# Altium PCB TPS5430.PcbDoc
Units mm, origin at the board's own origin, x right, y up, seen from the top; angles counter-clockwise.
Board outline 24.89 x 15.75 mm, 2 copper layers (Top Layer, Bottom Layer); 13 components, 7 nets, 49 pads, 5 vias.
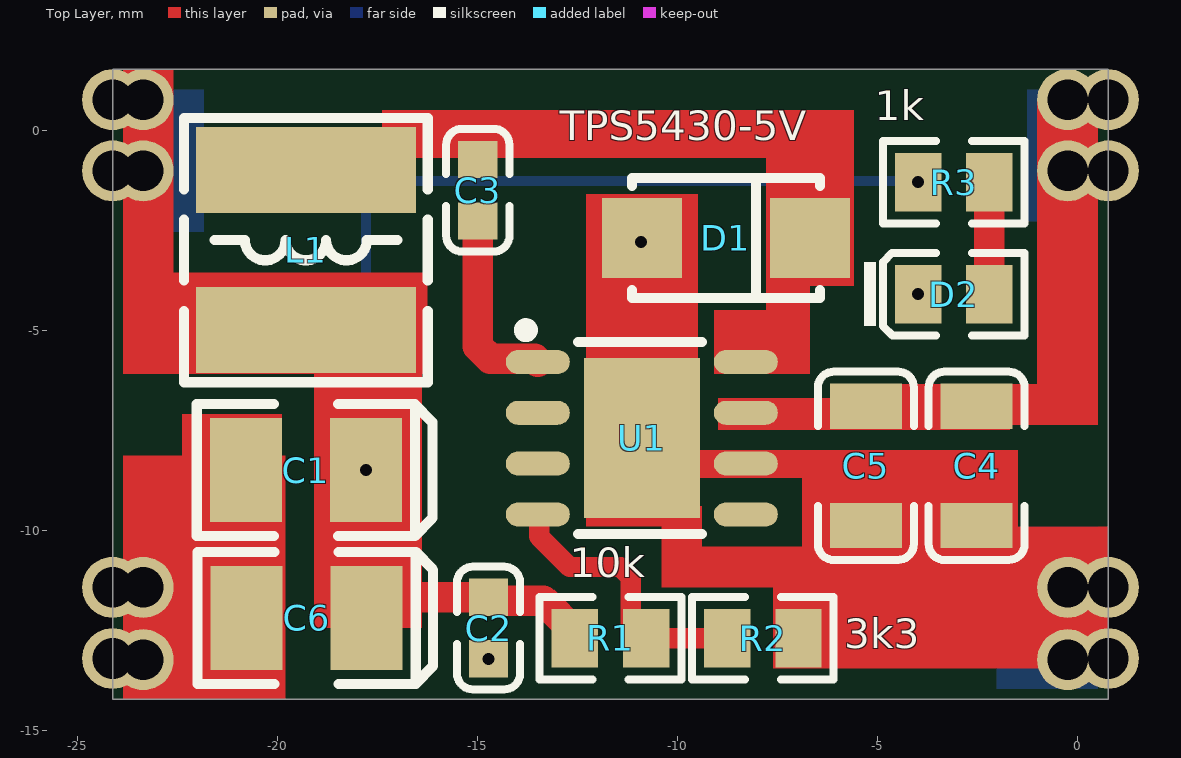
[diagram p0: Top Layer view]
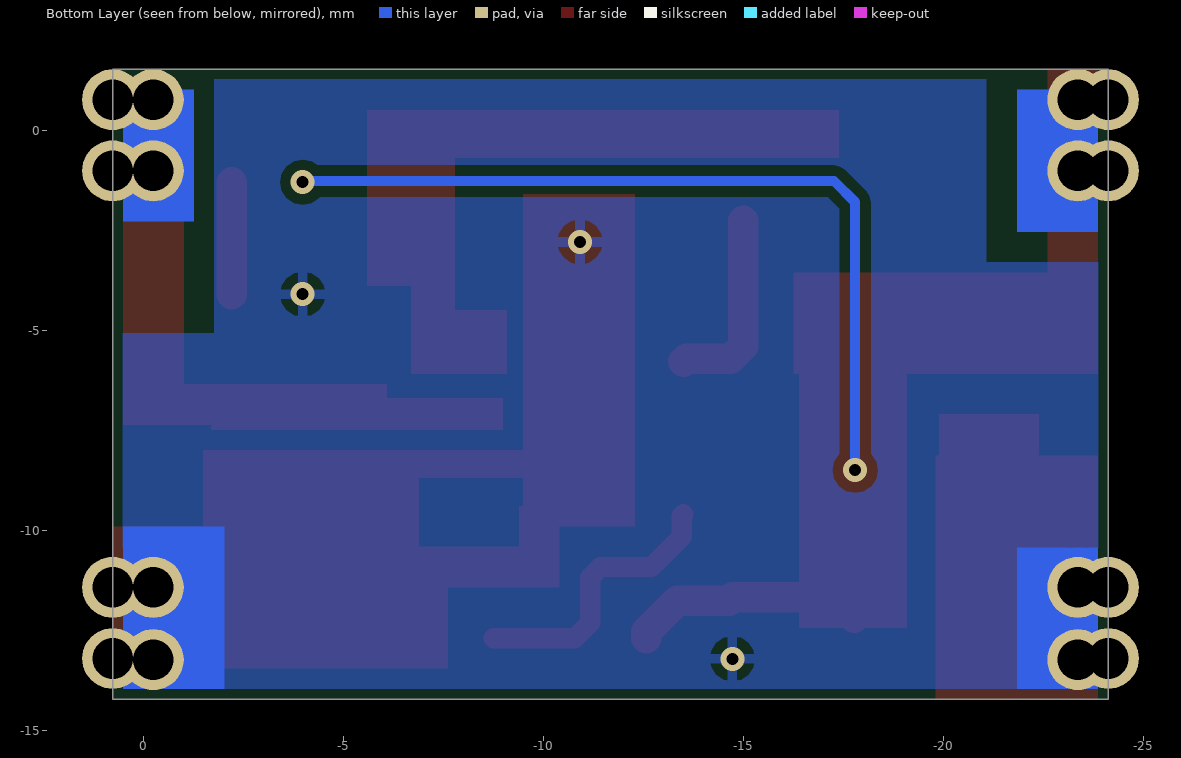
[diagram p1: Bottom Layer view, seen from below]
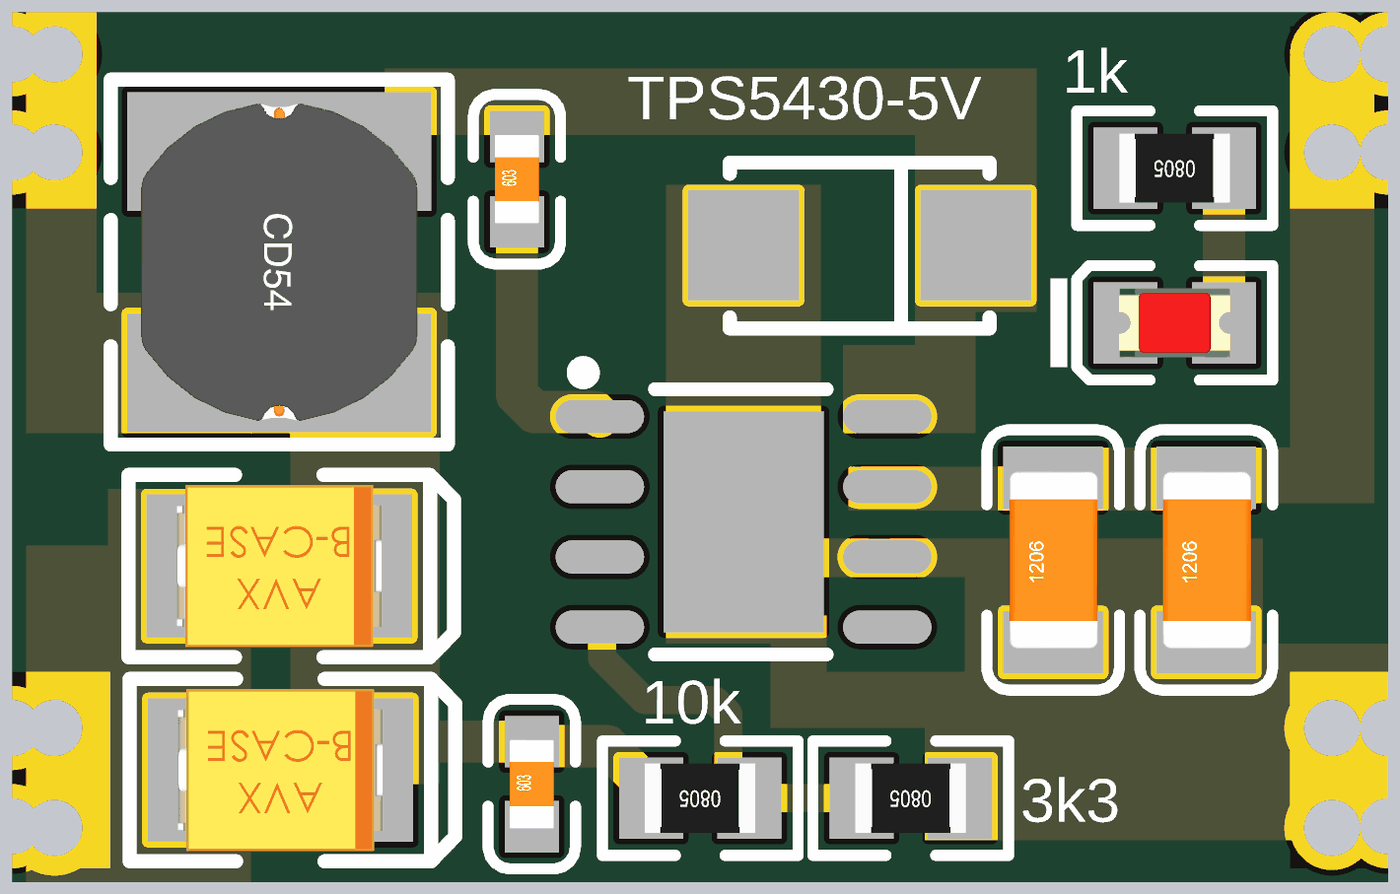
[diagram p2: 3D render of the assembled board from above, using the file's embedded part models]

## Layer stack, top to bottom
Top Solder: solder mask 0.0102, Solder Resist, Dk 3.5
Top Layer: signal copper 0.0356
Dielectric1: dielectric 0.32, FR-4, Dk 4.8
Bottom Layer: signal copper 0.0356
Bottom Solder: solder mask 0.0102, Solder Resist, Dk 3.5

## Board outline
-24.13,-14.224 0.762,-14.224 0.762,1.524 -24.13,1.524

## Design rules (kind name [scope] priority, off if disabled: settings)
Clearance [All] p1: gap=0.254 ignorepadtopadclearanceinfootprint=FALSE except(0: Arc-Hole Track-Hole SMDPad-Hole THPad-Hole Via-Hole Fill-Hole Poly-Hole Region-Hole Text-Hole)
HoleSize [All] p1: absolutevalues=TRUE maxlimit=5.08 minlimit=0.025 maxpercent=80.000 minpercent=20.000
MinimumSolderMaskSliver [All] p1: minsoldermaskwidth=0.076
PolygonConnect [All] p1: connectstyle=Relief reliefconductorwidth=0.254 reliefentries=4 polygonreliefangle="90 Angle" airgapwidth=0.254
RoutingVias [All] p1: holewidth=0.711 width=1.27 viastyle="Through Hole" minholewidth=0.711 minwidth=1.27 maxholewidth=0.711 maxwidth=1.27
SilkToSilkClearance [All] p1: silktosilkclearance=0
SilkToSolderMaskClearance SilkscreenOverComponentPads [IsPad] p1: minsilkscreentomaskgap=0 clearancetoexposedcopper=TRUE
SolderMaskExpansion [All] p1: expansion=0.102
Width [All] p1: maxlimit=0.762 minlimit=0.152 preferedwidth=0.254
26 further rules are at their usual default settings.

## Components (designator, comment, footprint, x,y, rotation, side; value= is the part's Value field where it differs from the comment)
C1 "100uF (107) ±10% 6.3V" LC-CASE-B_3528 -19.3,-8.5 r0 top
C2 "100nF (104) 10% 50V" LC-0603_C -14.732,-12.446 r90 top
C3 "10nF (103) 10% 50V" LC-0603_C -15,-1.5 r90 top
C4 "4.7uF (475) 10% 50V" LC-1206_C -2.53,-8.39 r90 top
C5 "4.7uF (475) 10% 50V" LC-1206_C -5.3,-8.39 r90 top
C6 "100uF (107) ±10% 6.3V" LC-CASE-B_3528 -19.28,-12.192 r0 top (schematic designator C1)
D1 "SS54" LC-SMA(DO-214AC)_S1 -8.8,-2.7 r180 top
D2 "红灯 0805" LC-0805_LED_S1 -3.1,-4.1 r0 top
L1 "22uH" CD54 -19.3,-3 r270 top
R1 "10KΩ (1002) ±1%" LC-0805_R -11.684,-12.7 r180 top
R2 "3.3KΩ (3301) ±1%" LC-0805_R -7.874,-12.7 r180 top
R3 "1KΩ (1001) ±1%" LC-0805_R -3.1,-1.3 r180 top
U1 "TPS5430DDAR" LC-SOP-8_EP_150mil -10.9,-7.7 r270 top

## Footprints (in the part's own frame and the unit in brackets; to place one, negate y for a bottom-side part, rotate by r counter-clockwise, add the part's x,y. Pads: shape width x height; smd on the part's side, far side on the other; paste and mask are expansions set on the pad)
CD54 [mm] "5.8*5.2*4.5mm（长宽高）"
  rect 2.15x5.5 smd: 1(-2,0) 2(2,0)
  silkscreen extent -3.3,-3.05 3.3,3.05, body extent -2.87,-2.5 2.87,2.5, height 4
LC-0603_C [mm]
  rect 0.93x0.98 smd: 1(-0.77,0) 2(0.77,0)
  silkscreen extent -1.53,-0.79 1.54,0.79, body extent -0.8,-0.4 0.8,0.4, height 0.3
LC-0805_LED_S1 [mm]
  rect 1.16x1.47 smd: A(0.89,0) K(-0.89,0)
  silkscreen extent -2.24,-1.04 1.77,1.03, body extent -1.01,-0.62 1.01,0.62, height 1.1
LC-0805_R [mm]
  rect 1.16x1.47 smd: 1(-0.89,0) 2(0.89,0)
  silkscreen extent -1.77,-1.04 1.77,1.03, body extent -1,-0.62 1,0.63, height 0.49
LC-1206_C [mm]
  rect 1.13x1.8 smd: 1(-1.49,0) 2(1.49,0)
  silkscreen extent -2.36,-1.2 2.35,1.2, body extent -1.6,-0.81 1.6,0.79, height 1
LC-CASE-B_3528 [mm]
  rect 1.8x2.6 smd: 1(1.5,0) 2(-1.5,0)
  silkscreen extent -2.73,-1.65 3.16,1.65, body extent -1.85,-1.47 1.85,1.46, height 2.03
LC-SMA(DO-214AC)_S1 [mm]
  rect 2x2 smd: 1(2.1,0) 2(-2.1,0)
  silkscreen extent -2.35,-1.5 2.35,1.5
LC-SOP-8_EP_150mil [mm]
  rect 4x2.9 smd: 0(0,0)
  oval 0.6x1.6 smd: 1(-1.905,-2.6) 2(-0.635,-2.6) 3(0.635,-2.6) 4(1.905,-2.6) 5(1.905,2.6) 6(0.635,2.6) 7(-0.635,2.6) 8(-1.905,2.6)
  silkscreen extent -2.85,-3.05 2.4,1.5

## Part data
C1 C6: library part "3528 100uF (107) 10% 6.3V", "钽电容", Package=3528, SuppliersPartNumber=C16133, ComponentLink1Description=供应, ComponentLink1URL=http://www.szlcsc.com/product/details_16815.html, Supplier=LC
C2: library part "0603 100nF (104) 10% 50V", "贴片电容", Package=0603, SuppliersPartNumber=C14663, ComponentLink1Description=供应, ComponentLink1URL=http://www.szlcsc.com/product/details_15331.html, Supplier=LC
C3: library part "0603 10nF (103) 10% 50V", "贴片电容", Package=0603, SuppliersPartNumber=C57112, ComponentLink1Description=供应, ComponentLink1URL=http://www.szlcsc.com/product/details_58143.html, Supplier=LC
C4 C5: library part "1206 4.7uF (475) 10% 50V", "贴片电容", Package=1206, SuppliersPartNumber=C29823, ComponentLink1Description=供应, ComponentLink1URL=http://www.szlcsc.com/product/details_30577.html, Supplier=LC
D1: library part "SMA(DO-214AC) SS54", "二极管", Package=SMA(DO-214AC), SuppliersPartNumber=C22452, ComponentLink1Description=供应, ComponentLink1URL=http://www.szlcsc.com/product/details_23178.html, Supplier=LC
D2: library part "0805 红灯", "发光二极管", Package=0805, SuppliersPartNumber=C2295, ComponentLink1Description=供应, ComponentLink1URL=http://www.szlcsc.com/product/details_2668.html, Supplier=LC
L1: library part L-CD, "贴片功率电感"
R1: library part "0805 10KΩ (1002) 1%", "贴片电阻", Package=0805, SuppliersPartNumber=C17414, ComponentLink1Description=供应, ComponentLink1URL=http://www.szlcsc.com/product/details_18102.html, Supplier=LC
R2: library part "0805 3.3KΩ (3301) 1%", "贴片电阻", Package=0805, SuppliersPartNumber=C26010, ComponentLink1Description=供应, ComponentLink1URL=http://www.szlcsc.com/product/details_26753.html, Supplier=LC
R3: library part "0805 1KΩ (1001) 1%", "贴片电阻", Package=0805, SuppliersPartNumber=C17513, ComponentLink1Description=供应, ComponentLink1URL=http://www.szlcsc.com/product/details_18201.html, Supplier=LC
U1: "DC-DCоƬ", Package=SOP-8_EP_150mil, SuppliersPartNumber=C9864, ComponentLink1Description=供应, ComponentLink1URL=http://www.szlcsc.com/product/details_10396.html, Supplier=LC

## Free pads (board coordinates)
  round 1.524 hole 1.016: 11(-24.13,-13.208) 11(-24.13,-11.43) 11(-24.13,-1.016) 11(-24.13,0.762) 11(-23.368,-13.238) 11(-23.368,-11.43) 11(-23.368,-1.016) 11(-23.368,0.762) 11(-0.254,-13.238) 11(-0.254,-11.43) 11(-0.254,-1.016) 11(-0.254,0.762) 11(0.762,-13.208) 11(0.762,-11.43) 11(0.762,-1.016) 11(0.762,0.762)

## Via types
v1: diameter 0.6, hole 0.3, Top Layer to Bottom Layer, 5 vias

## Nets (pads, with @x,y where several pads share a name; then routed paths per layer and width w, separated by ;. In a path a pad name is that pad's centre, name@x,y a point inside that pad or via, vN(x,y) a via of type N, cw(c..) or ccw(c..) an arc to the next point about the centre after c; other vN are vias at no path point)
5V: C1.1 C2.2 C6.1 L1.2 pad.11@-23.368,0.762 pad.11@-23.368,-1.016 pad.11@-24.13,0.762 pad.11@-24.13,-1.016 R1.2 R3.2 | length 26.7
  Top Layer w0.762: C6.1 -17.264,-11.676 C2.2 -14.648,-11.76 -13.359,-11.76 -12.574,-12.545 R1.2
  Bottom Layer w0.254: v1(-17.8,-8.5) -17.8,-1.798 -17.272,-1.27 -4.02,-1.27 v1(-3.99,-1.3)
GND: C1.2 C2.1 C4.1 C5.1 C6.2 D1.1 D2.K pad.11@0.762,-11.43 pad.11@0.762,-13.208 pad.11@-0.254,-11.43 pad.11@-0.254,-13.238 pad.11@-23.368,-11.43 pad.11@-23.368,-13.238 pad.11@-24.13,-11.43 pad.11@-24.13,-13.208 R2.1 U1.0 U1.6
  other v1: -14.732,-13.216 -3.99,-4.1 -10.922,-2.794
NetC3_1: C3.1 U1.1 | length 4.8
  Top Layer w0.762: C3.1 -15,-5.4 -14.686,-5.714 -13.581,-5.714 U1.1
NetC3_2: C3.2 D1.2 L1.1 U1.8
NetD2_A: D2.A R3.1 | length 2.8
  Top Layer w0.762: D2.A R3.1
NetR1_1: R1.1 R2.2 U1.4 | length 7
  Top Layer w0.508: U1.4 -13.462,-9.643 -13.462,-10.16 -12.7,-10.922 -11.43,-10.922 -11.176,-11.176 -11.176,-12.318 R1.1 R2.2
VCC: C4.2 C5.2 pad.11@0.762,0.762 pad.11@0.762,-1.016 pad.11@-0.254,0.762 pad.11@-0.254,-1.016 U1.7
pads on no net: U1.2 U1.3 U1.5

## Polygon pours and split planes (outlines as drawn)
GND on Bottom Layer "Bottom Layer-GND" (solid, remove dead copper, pour order 0): -23.876,-3.302 -21.082,-3.302 -21.082,1.27 -1.778,1.27 -1.778,-5.08 0.508,-5.08 0.508,-13.97 -23.876,-13.97

## Other copper
Top Layer:
  rectangle net GND: -7.62,-13.462 -5.842,-10.922
  rectangle net GND: -10.16,-11.43 -6.604,-10.414
  rectangle net GND: -10.414,-11.43 -9.398,-9.398
  rectangle net VCC: -6.096,-7.366 0.508,-6.35
  rectangle net VCC: -1.016,-7.366 0.508,0.762
  rectangle net GND: -6.858,-13.462 0.762,-9.906
  rectangle net GND: -23.876,-14.224 -19.812,-8.128
  rectangle net 5V: -23.876,-6.096 -16.256,-3.556
  rectangle net 5V: -23.876,-6.096 -22.606,1.524
  rectangle net NetC3_2: -7.8,-6.1 -6.7,-2
  rectangle net NetC3_2: -9.1,-6.1 -7,-4.5
  rectangle net VCC: -9,-7.5 -1.7,-6.7
  rectangle net GND: -10,-8.7 -1.5,-8
  rectangle net GND: -6.9,-11.6 -1.5,-8.1
  rectangle net GND: -22.4,-12.1 -19.9,-7.1
  rectangle net 5V: -19.1,-12.446 -16.4,-4
  rectangle net NetC3_2: -17.4,-0.7 -5.6,0.5
  rectangle net NetC3_2: -7.8,-3.9 -5.6,0.5
  rectangle net GND: -12.3,-9.906 -9.5,-1.6
Bottom Layer:
  rectangle net 5V: -23.876,-2.54 -21.844,1.016
  rectangle net GND: -23.876,-13.97 -21.844,-10.439
  rectangle net GND: -2.032,-13.97 0.508,-9.906
  rectangle net VCC: -1.27,-2.286 0.508,1.016

## Silkscreen, mask and mechanical layers (free items; w line width, h text height)
Top Overlay:
  text "1k" at -5.08,0 h1.27
  text "TPS5430-5V" at -12.954,-0.508 h1.27
  text "10k" at -12.7,-11.43 h1.27
  text "3k3" at -5.842,-13.208 h1.27
Top Solder:
  rectangle: -1.016,-2.032 0.762,1.27
  rectangle: -1.016,-13.97 1.016,-10.414
  rectangle: -24.384,-13.97 -22.352,-10.414
  rectangle: -24.638,-2.032 -22.606,1.524
Bottom Solder:
  rectangle: -0.762,-14.224 1.27,-10.668
  rectangle: -1.016,-2.032 1.016,1.27
  rectangle: -24.384,-14.224 -22.606,-10.414
  rectangle: -24.13,-2.032 -22.352,1.27
Mechanical 1:
  the board outline again, w0.127